# Altium PCB ALTAIR_PD_Sergeant_V26.3b.PcbDoc (part 3 of 4)
Units mm, origin at the board's own origin, x right, y up, seen from the top; angles counter-clockwise.
Board outline 74 x 56 mm, 4 copper layers (Top Layer, Layer 1, Layer 2, Bottom Layer), stack 1.675 mm thick; 222 components, 148 nets, 692 pads, 512 vias.
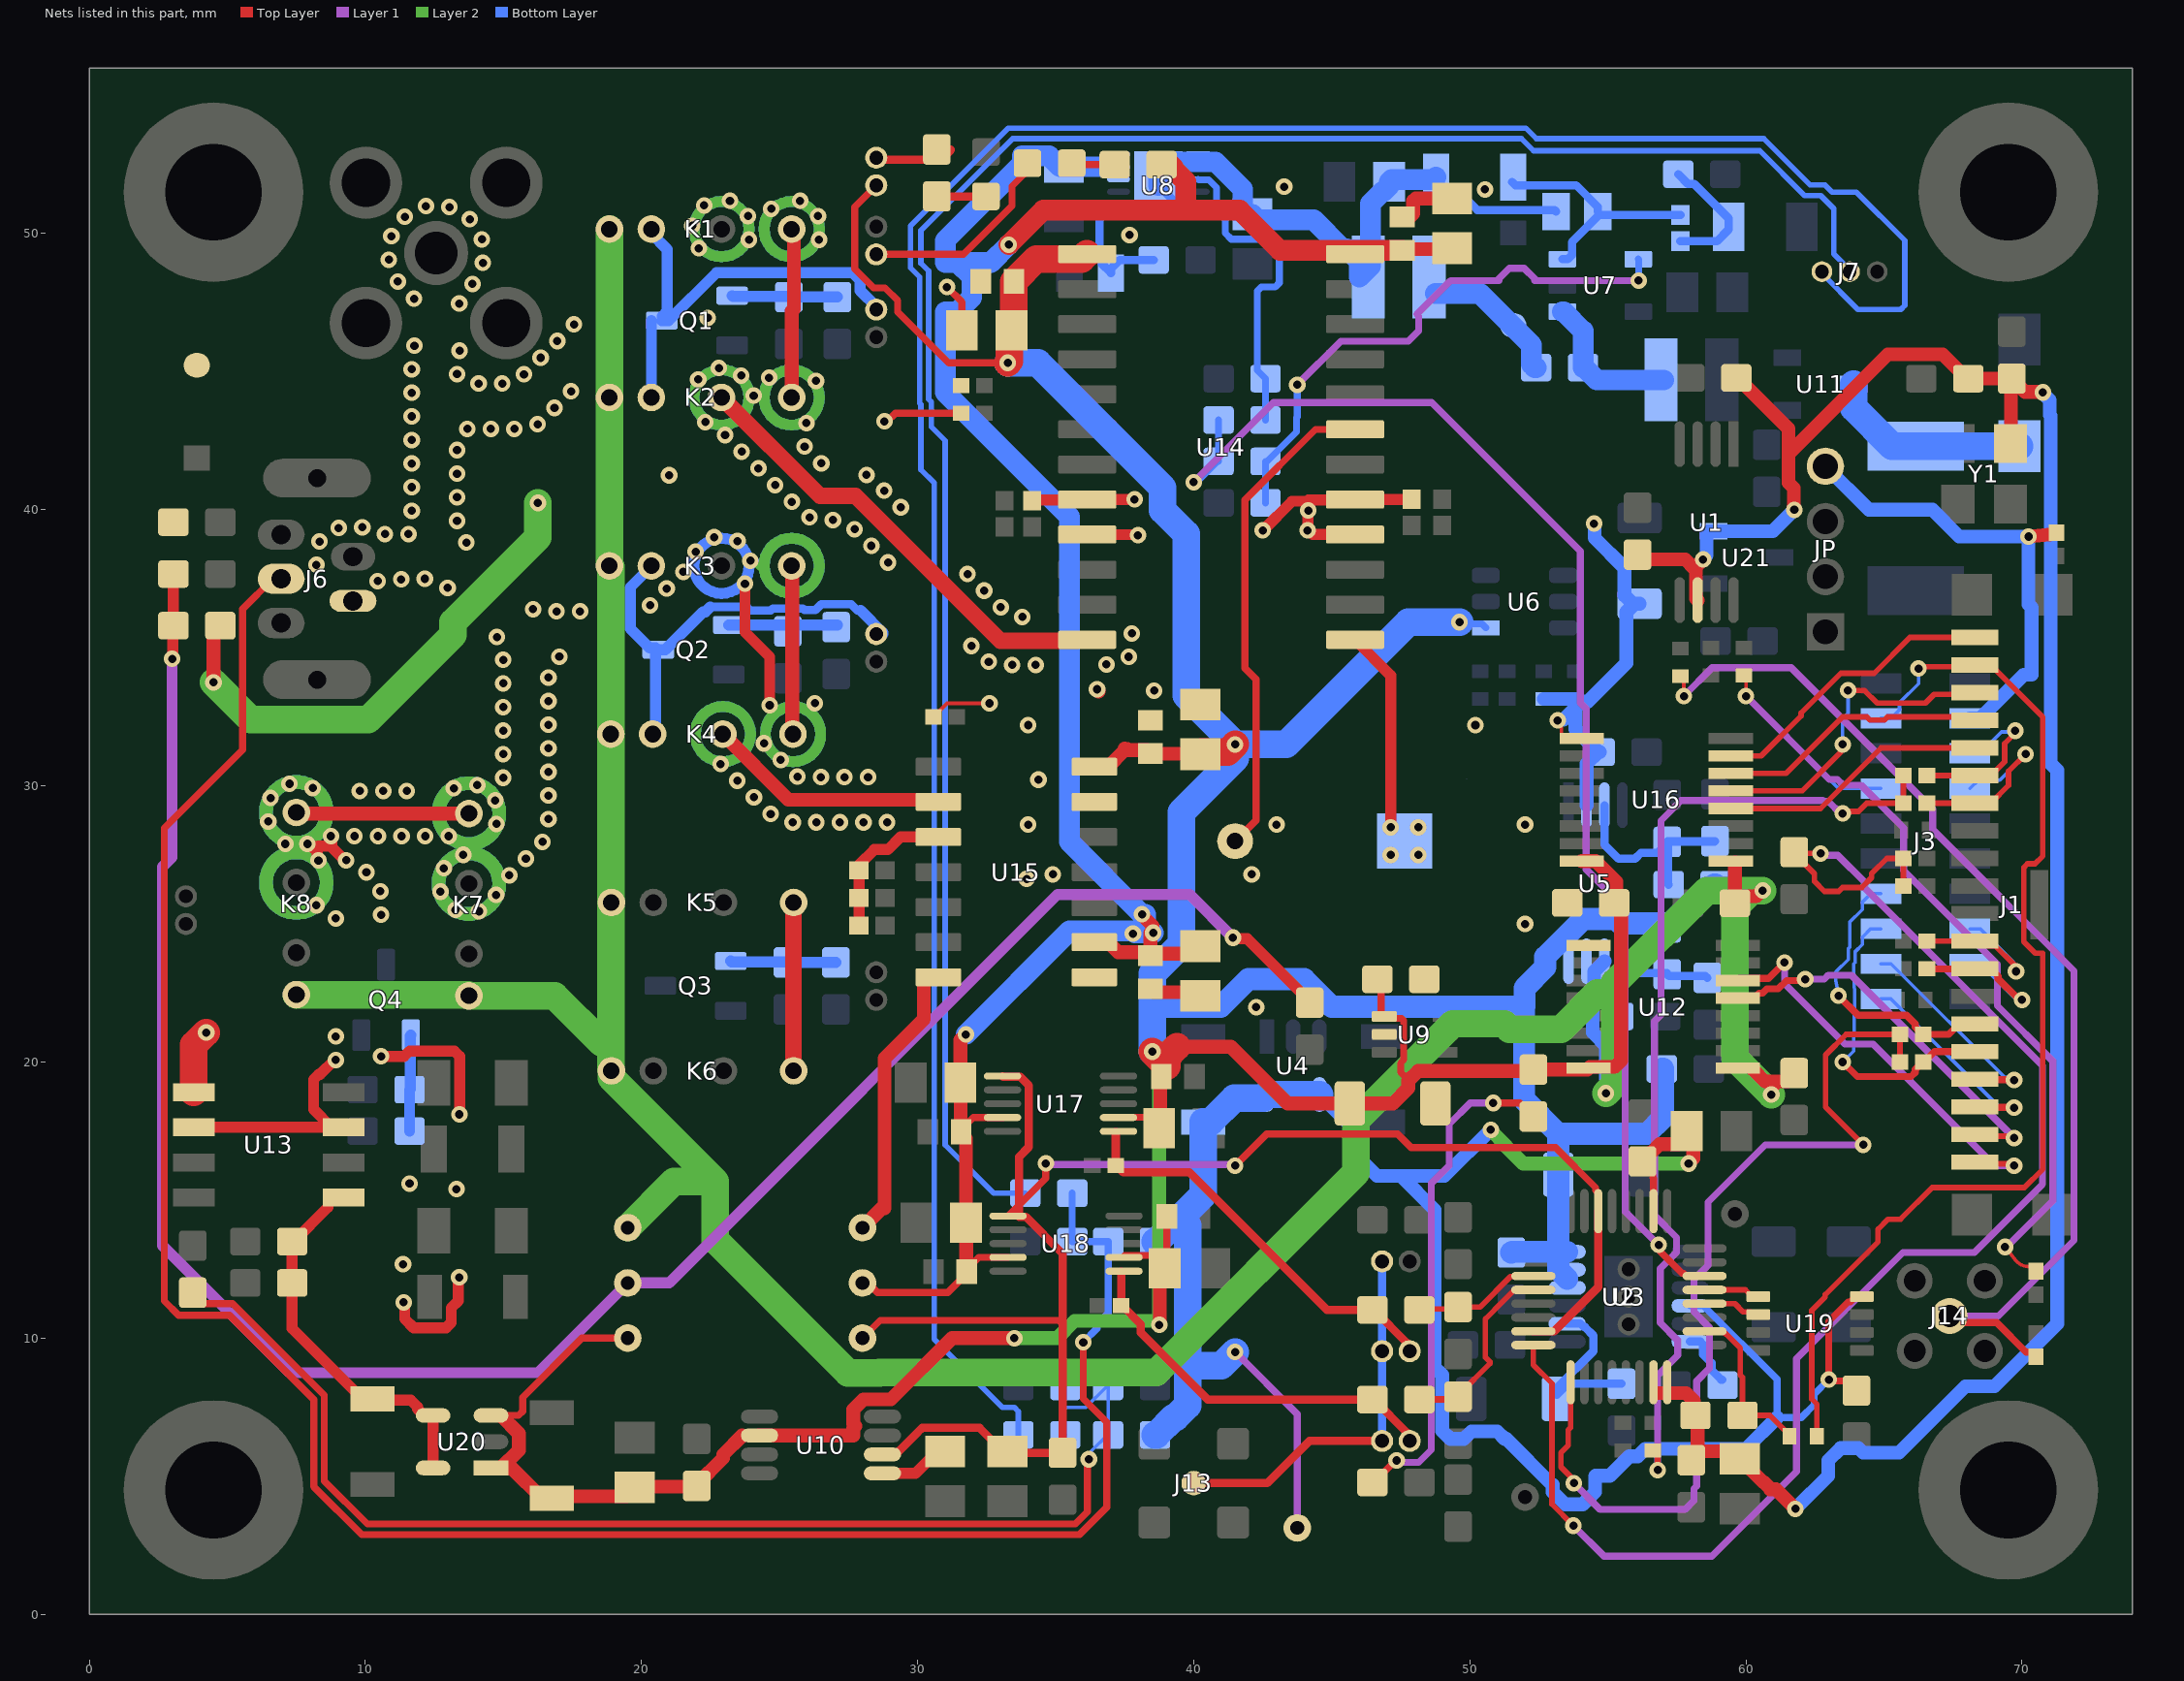
[diagram p4: the nets of this part, all layers, seen from the top]

## Via types
v1: diameter 0.6, hole 0.3, Top Layer to Bottom Layer, 346 vias
v2: diameter 0.8, hole 0.5, Top Layer to Bottom Layer, 122 vias
v3: diameter 0.6, hole 0.3, Top Layer to Bottom Layer, tented both sides, 44 vias

## Nets (pads, with @x,y where several pads share a name; then routed paths per layer and width w, separated by ;. In a path a pad name is that pad's centre, name@x,y a point inside that pad or via, vN(x,y) a via of type N, cw(c..) or ccw(c..) an arc to the next point about the centre after c; other vN are vias at no path point) (continued)
GUARD: (continued)
  other v1: 11.362,12.676 13.3,15.4 11.6,15.6 8.93,20.929 8.93,25.199 10.57,25.33 14.116,25.46 13.264,25.51 8.225,25.68 14.732,26.052 12.722,26.17 10.544,26.184 15.209,26.76 10.038,26.871 12.841,27.016 15.813,27.364 13.541,27.504 7.1,27.9 16.412,27.973 9.603,28.18 10.457,28.18 11.311,28.18 12.165,28.18 13.019,28.18 14.745,28.623 25.476,28.68 26.33,28.68 27.184,28.68 28.038,28.68 28.892,28.68 6.484,28.713 16.63,28.799 24.677,28.983 14.704,29.476 6.569,29.563 24.073,29.587 16.63,29.653 9.793,29.82 10.647,29.82 11.501,29.82 8.092,29.925 13.204,29.916 14.051,30.026 7.251,30.076 23.469,30.191 14.99,30.295 25.644,30.335 26.498,30.32 27.352,30.32 28.206,30.32 16.63,30.507 22.866,30.795 25.04,30.939 14.99,31.149 16.63,31.361 24.436,31.543 14.99,32.003 16.63,32.215 14.99,32.857 26.281,32.995 16.63,33.069 14.99,33.711 16.63,33.923 33.423,34.379 34.277,34.379 36.839,34.396 32.577,34.495 14.99,34.565 17.024,34.68 37.646,34.675 31.947,35.071 14.763,35.388 37.762,35.521 33.795,36.121 16.922,36.32 17.776,36.32 16.071,36.398 33.014,36.467 20.309,36.541 32.41,37.071 20.913,37.144 12.979,37.172 10.447,37.418 11.298,37.48 12.152,37.501 31.806,37.675 21.516,37.748 8.223,38.004 28.928,38.091 21.957,38.48 28.324,38.695 13.656,38.813 8.337,38.85 23.475,38.866 22.632,39.003 10.706,39.12 11.56,39.12 27.72,39.298 9.035,39.343 9.888,39.367 13.32,39.598 26.933,39.629 26.084,39.727 11.68,39.965 29.391,40.09 25.443,40.291 13.32,40.452 28.787,40.694 11.68,40.819 24.839,40.894 28.151,41.264 13.32,41.306 24.235,41.498 11.68,41.673 26.51,41.686 23.631,42.102 13.32,42.16 25.906,42.29 11.68,42.527 23.027,42.706 13.69,42.93 14.544,42.93 15.398,42.93 16.236,43.094 25.97,43.141 22.314,43.176 11.68,43.381 16.849,43.689 24.063,44.133 11.68,44.235 17.452,44.293 14.103,44.57 14.957,44.57 26.317,44.668 22.054,44.72 24.618,44.782 23.611,44.858 13.32,44.911 15.743,44.903 11.68,45.089 22.802,45.131 16.347,45.506 13.415,45.759 11.775,45.938 16.951,46.11 17.555,46.714 22.4,46.949 13.4,47.467 11.76,47.646 13.876,48.176 11.175,48.268 14.256,48.941 10.851,49.058 22.078,49.468 14.22,49.794 23.892,49.782 26.432,49.782 10.943,49.907 21.837,50.287 13.779,50.525 11.429,50.609 23.854,50.635 26.394,50.635 24.7,50.9 13.045,50.962 12.192,50.994 22.269,51.023 23.203,51.188 25.743,51.188
IVC_ADCIN: C63.2 R75.2 U2.4 | length 6.8
  Top Layer w0.2: C63.2@49.646,8.004 50.725,9.083 50.725,9.141 50.565,9.301 50.565,10.699 51.201,11.335 ; 51.202,11.335 51.598,11.731 U2.4@52.272,11.731
  Top Layer w0.254: R75.2@48.171,7.779 49.471,7.779 C63.2@49.571,7.879
IVC_CAPLINK: R58.1 R59.1 R60.1 U15.3 | length 5.5
  Top Layer w0.4: R60.1@27.875,24.941 27.875,27.137 28.431,27.693 28.923,27.693 29.381,28.151 U15.3@30.75,28.151
IVC_LVLAMP_OUT: JIVC.1 R63.2 R75.1 U18.6 | length 14
  Top Layer w0.3: U18.6@37.375,12.4 R63.2@37.375,11.185 37.4,11.185 38.08,10.505 38.08,10.202 40.503,7.779 R75.1@46.471,7.779 46.521,7.779 47.725,6.575 47.725,6.375 JIVC.1@47.821,6.279
IVC_RELAY_GND: J11.2 K3.2 K4.2 Q2.3 | length 16.4
  Bottom Layer w0.3: 22.494,36.483 23.82,36.483 23.945,36.358 24.619,36.358 24.689,36.358 24.758,36.427 25.842,36.427 25.902,36.367 26.298,36.367 26.508,36.577 27.592,36.577 27.811,36.358 27.931,36.358
  Bottom Layer w0.4: K3.2@20.358,37.971 20.358,37.954 19.589,37.184 19.589,35.699 20.288,35 Q2.3@20.5,35 ; K4.2@20.405,31.874 20.506,31.975 20.506,34.931 Q2.3@20.506,34.994 ; Q2.3@20.607,34.931 20.857,34.931 22.226,36.3 22.311,36.3 22.494,36.483 ; 27.931,36.358 28.75,35.539 J11.2@28.75,35.5
IVC_SW_1: J1.19 U12.5 | length 14.3
  Top Layer w0.2: J1.19@68.291,17.375 68.354,17.313 69.648,17.313 v1(69.71,17.25)
  Top Layer w0.254: U12.5@59.7,22.317 60.295,22.317 60.471,22.493 60.605,22.493 60.761,22.65 61.165,22.65 61.466,22.951 62.098,22.951 v1(62.147,23)
  Layer 1 w0.254: v1(62.147,23) 62.836,23 62.983,23.147 63.813,23.147 v1(69.71,17.25)
IVC_SW_1_Sol: J1.17 J3.17 | length 8
  Top Layer w0.254: J1.17@68.291,19.375 68.305,19.361 69.696,19.361 v1(69.71,19.347)
  Bottom Layer w0.127: J3.17@64.887,23.555 65.255,23.555 69.373,19.438 69.619,19.438 v1(69.71,19.347)
IVC_SW_2: J1.20 U12.6 | length 15.2
  Top Layer w0.2: J1.20@68.291,16.375 68.354,16.312 69.648,16.312 v1(69.71,16.25)
  Top Layer w0.254: U12.6@59.7,22.952 59.778,23.031 60.823,23.031 v1(61.396,23.604)
  Layer 1 w0.254: v1(61.396,23.604) 61.396,22.836 63.585,20.647 64.603,20.647 69,16.25 v1(69.71,16.25)
IVC_SW_2_Sol: J1.18 J3.19 | length 7.9
  Top Layer w0.254: J1.18@68.291,18.375 68.305,18.361 69.696,18.361 v1(69.71,18.347)
  Bottom Layer w0.127: J3.19@64.887,22.285 65.255,22.285 69.193,18.347 v1(69.71,18.347)
IVC_SW_IN: K4.3 U15.2 | length 8.8
  Top Layer w0.5: K4.3@22.945,31.874 25.319,29.5 U15.2@30.75,29.5
MMCX_Testcon: J13.1 JACF.2 JIVC.2 JTIA.2 | length 14
  Top Layer w0.3: J13.1@40,4.75 42.658,4.75 44.187,6.279 JIVC.2@46.821,6.279
  Bottom Layer w0.3: JIVC.2@46.821,6.279 JACF.2@46.821,9.529 JTIA.2@46.821,12.779
NEG_SW: R19.2 R20.2 U2.22 | length 48.7
  Top Layer w0.254: v1(56.837,13.377) 56.903,13.311 56.903,13.126 57.683,12.346 57.742,12.346 57.838,12.25 U2.22@58.5,12.25
  Layer 1 w0.254: v1(40,41) 42.881,43.881 48.619,43.881 54,38.5 54,33.008 54.208,32.8 54.208,26.974 55.627,25.555 55.627,14.587 v1(56.837,13.377)
  Bottom Layer w0.254: v1(40,41) 40.066,41.066 40.166,41.066 40.85,41.75 R20.2@40.9,41.75 R19.2@40.9,43.25
NetC00_2: C00.2 R0.1 R33.1 TP7.1 | length 76.7
  Top Layer w0.4: v1(3,34.6) 3.024,34.624 C00.2@3.024,35.777 ; C00.2@3.047,35.801 R0.1@3.047,37.676 ; v1(41.417,24.503) 41.456,24.465 41.935,24.465 44.2,22.2 R33.1@44.2,22.15
  Layer 1 w0.4: v1(3,34.6) 3,27.419 2.646,27.065 2.646,13.354 7.25,8.75 16.25,8.75 TP7.1@19.5,12 21,12 35.07,26.07 39.85,26.07 v1(41.417,24.503)
NetC3_2: C3.2 R15.2 U3.8 | length 6.3
  Bottom Layer w0.3: U3.8@53.525,10.525 54.004,10.525 54.127,10.402 54.168,10.402 54.477,10.093 54.477,9.527 53.15,8.2 53.15,7.95 53.55,8.35 R15.2@55.5,8.35
NetC7_1: C7.1 U10.5 | length 2
  Top Layer w0.4: U10.5@28.725,5.108 29.925,5.108 C7.1@30.5,5.683
NetC10_2: C10.2 R21.1 R22.2 U5.5 | length 5.6
  Bottom Layer w0.3: C10.2@55.375,21.65 55.51,21.785 55.51,23.634 U5.5@55.525,23.65 55.525,23.262 55.562,23.225 R21.1@57.15,23.225 ; R21.1@57.15,23.175 57.212,23.113 58.538,23.113 R22.2@58.6,23.05
NetC11_2: C11.2 R23.1 R24.2 U5.3 | length 7.5
  Bottom Layer w0.3: U5.3@54.875,29.3 54.875,27.872 55.383,27.365 55.986,27.365 56.2,27.579 56.8,27.579 57.15,27.929 C11.2@57.15,27.975 ; R23.1@57.2,26.425 57.175,26.45 57.175,27.95 C11.2@57.15,27.975 ; R24.2@58.875,28 58.862,27.988 57.162,27.988 C11.2@57.15,27.975
NetC15_1: C15.1 L1.2 U7.1 | length 5.4
  Bottom Layer w0.75: U7.1@53.35,47.175 53.4,47.175 54.1,46.475 C15.1@54.1,45.15 ; C15.1@54.15,45.15 54.6,44.7 L1.2@57.024,44.7
NetC15_2: C15.2 D1.2 L2.1 | length 5.2
  Bottom Layer w0.75: L2.1@48.75,47.836 50.364,47.836 51.454,46.746 51.454,46.741 52.225,45.97 52.225,45.275 52.35,45.15 C15.2@52.4,45.15
NetC16_2: C16.2 R29.1 R30.2 U7.3 | length 8.7
  Bottom Layer w0.3: C16.2@51.525,51.875 51.648,51.752 53.848,51.752 54.625,50.975 R29.1@54.625,50.8 ; U7.3@53.35,49.075 53.55,49.075 53.7,49.225 53.7,49.7 R29.1@54.625,50.625 ; R29.1@54.746,50.679 R30.2@57.625,50.679
NetC17_1: C17.1 R30.1 R31.2 | length 4.8
  Bottom Layer w0.3: C17.1@57.55,52.15 57.9,51.8 58.125,51.8 59.375,50.55 R31.2@59.375,50.25 59.375,50.146 58.95,49.721 R30.1@57.625,49.721
NetC21_1: C21.1 R32.1 U8.8 | length 5
  Bottom Layer w0.3: U8.8@37.278,51.067 36.875,51.067 36.586,50.778 36.586,49.389 36.675,49.3 36.675,48.9 C21.1@37,48.575 37,48.725 37.325,49.05 R32.1@38.55,49.05
NetC32_2: C32.2 R49.1 R50.2 R51.1 RT1.2 | length 46.6
  Top Layer w0.254: RT1.2@3.75,11.65 3.75,11.619 4.123,11.246 5.195,11.246 8.512,7.929 8.512,4.829 10.07,3.271 35.707,3.271 36.148,3.712 36.148,5.562 v1(36.202,5.616)
  Bottom Layer w0.127: R49.1@35.35,6.5 35.25,6.6 35.25,7.426 ; R50.2@35.35,8.25 35.25,8.15 35.25,7.426 ; v1(36.202,5.616) 36.293,5.707 36.293,5.91 36.883,6.5 R51.1@36.9,6.5 C32.2@36.9,8.25 36.85,8.25 36.1,7.5 35.324,7.5 35.25,7.426
NetD2_2: D2.2 R18.1 | length 1.8
  Top Layer w0.3: R18.1@30.696,51.35 D2.2@32.475,51.35
NetD4_1: D4.1 F1.2 U11.3 | length 7.4
  Bottom Layer w1: U11.3@63.9,44.55 63.9,43.695 65.29,42.305 F1.2@66.15,42.305 66.153,42.303 69.897,42.303 D4.1@69.9,42.3
NetD5_1: D5.1 R79.1 | length 1.6
  Top Layer w0.254: D5.1@35.8,52.5 R79.1@37.4,52.5
NetD5_2: -11.1 D5.2 | length 7.5
  Top Layer w0.254: -11.1@28.5,49.25 31.661,49.25 33.417,51.006 33.417,51.717 D5.2@34.2,52.5
NetJ6_3: J6.3 R44.1 R47.1 R48.2 | length 81.4
  Top Layer w0.254: J6.3@6.95,37.5 6.65,37.5 5.551,36.401 5.551,31.305 2.719,28.473 2.719,11.345 3.238,10.826 5.076,10.826 8.131,7.771 8.131,4.619 9.86,2.89 35.865,2.89 36.849,3.875 36.849,6.958 36,7.807 v1(36,9.853)
  Bottom Layer w0.254: R47.1@35.6,15.25 R48.2@35.6,13.5 R44.1@36.9,13.5 36.9,10.9 36.498,10.498 36.498,10.351 v1(36,9.853)
NetJ7_1: J7.1 R49.2 | length 90.8
  Bottom Layer w0.2: R49.2@33.65,6.5 33.65,7.347 33.501,7.496 33.068,7.496 30.6,9.964 30.6,40.973 30.119,41.454 30.119,43.817 30.071,43.865 30.071,48.434 29.738,48.767 29.738,50.273 33.288,53.823 52.025,53.823 52.406,53.442 60.643,53.442 62.324,51.76 62.863,51.76 63.123,51.5 64,51.5 65.75,49.75 65.75,47.399 65.601,47.25 64.056,47.25 62.75,48.556 J7.1@62.75,48.625
NetJ7_2: J7.2 R47.2 | length 75.1
  Bottom Layer w0.2: R47.2@33.9,15.25 32.75,15.25 31,17 31,42.5 30.5,43 30.5,43.899 30.398,44.001 30.398,48.645 30.119,48.924 30.119,50.115 33.446,53.442 51.868,53.442 52.309,53 60.5,53 62.121,51.379 62.705,51.379 63.18,50.904 63.18,49.264 63.75,48.694 J7.2@63.75,48.625
NetJ9_1: J9.1 U14.1 | length 7.3
  Top Layer w0.4: U14.1@45.843,35.29 47.133,34 v3(47.133,28.5)
  other v3: 47.133,27.5 48.133,27.5 48.133,28.5
NetJ14_1: J14.1 R70.1 R72.1 | length 39.5
  Top Layer w0.127: R70.1@57.625,33.975 57.75,33.85 v1(57.75,33.25)
  Top Layer w0.254: J14.1@67.38,10.805 67.663,10.805 67.902,10.566 69.077,10.566 70.145,9.498 70.352,9.498 70.5,9.35 R72.1@70.5,9.325
  Layer 1 w0.254: v1(57.75,33.25) 58.778,34.278 61.637,34.278 66.759,29.156 66.759,28.419 71.881,23.297 71.881,13.542 69.144,10.805 J14.1@67.38,10.805
NetJLEDP_2: LED.2 R18.2 | length 2.1
  Top Layer w0.3: LED.2@28.775,52.675 R18.2@30.346,52.675 ; R18.2@30.846,52.675 31.196,53.025 31.196,53.05
NetK1_4: K1.4 K2.4 | length 6.3
  Top Layer w0.4: K2.4@25.438,44.062 K2.4@25.5,44
  Top Layer w0.5: K2.4@25.438,44.062 25.438,47.188 25.52,47.27 25.52,50.081 K1.4@25.438,50.163
NetK3_4: K3.4 K4.4 | length 6
  Top Layer w0.4: K3.4@25.438,37.971 K3.4@25.461,37.947 ; K4.4@25.461,32.039 K4.4@25.5,32
  Top Layer w0.5: K4.4@25.461,32.039 K3.4@25.461,37.947
NetK5_4: K5.4 K6.4 | length 6.1
  Top Layer w0.6: K5.4@25.5,25.75 25.509,25.741 K6.4@25.509,19.682
NetK7_4: K7.4 K8.4 | length 6.3
  Top Layer w0.5: K8.4@7.5,29 K7.4@13.75,29
NetQ1_1: Q1.1 R36.1 R37.1 | length 3.8
  Bottom Layer w0.4: Q1.1@23.284,47.753 23.309,47.728 25.313,47.728 R37.1@25.338,47.703 R36.1@27.092,47.703
NetQ2_1: Q2.1 R39.1 R40.1 | length 3.9
  Bottom Layer w0.4: Q2.1@23.157,35.831 R40.1@25.294,35.831 ; R40.1@25.3,35.825 R39.1@27.1,35.825
NetQ3_1: Q3.1 R42.1 R43.1 | length 3.8
  Bottom Layer w0.4: Q3.1@23.232,23.657 23.257,23.632 25.261,23.632 R43.1@25.286,23.607 R42.1@27.04,23.607
NetQ4_1: Q4.1 R38.1 R41.1 | length 3.5
  Bottom Layer w0.4: R38.1@11.6,17.5 R41.1@11.6,19 11.625,19.025 11.625,20.95 Q4.1@11.65,20.975
NetR1_2: R1.2 R2.2 U2.18 | length 6.1
  Top Layer w0.2: U2.18@58.5,10.25 59.177,10.25 59.3,10.127 59.306,10.127 59.794,9.639 59.794,8.659 59.871,8.582 R1.2@59.871,7.204 60.863,7.204 61.571,6.496 R2.2@61.571,6.446
NetR3_2: R3.2 R4.2 R65.2 | length 36
  Top Layer w0.2: R65.2@56.621,5.929 56.652,5.929 56.802,5.779 v1(56.802,5.227) ; v1(63.5,29) 63.577,29.077 64.077,29.077 64.375,29.375 R4.2@65.7,29.375 R3.2@65.7,30.375
  Layer 1 w0.254: v1(56.802,5.227) 56.802,8.653 57.531,9.383 57.531,9.919 56.896,10.554 56.896,12.522 57.484,13.109 57.484,13.645 56.688,14.441 56.688,21.477 56.921,21.71 56.921,28.746 57.647,29.472 62.773,29.472 62.801,29.444 62.981,29.444 63.425,29 v1(63.5,29)
NetR6_2: R6.2 R7.2 R8.1 U2.8 | length 55.1
  Top Layer w0.2: U2.8@52.3,9.75 52.3,9.029 52.972,8.357 52.972,3.988 v1(53.75,3.21) ; v1(62.702,27.556) 62.024,27.556 61.884,27.416 62.48,26.82 62.48,26.543 62.843,26.18 63.357,26.18 63.497,26.32 64.192,26.32 64.553,26.682 64.553,26.828 65.1,27.375 R6.2@65.7,27.375 R7.2@65.7,26.375
  Layer 1 w0.254: v1(53.75,3.21) 54.857,2.103 58.768,2.103 61.831,5.166 61.831,9.254 65.683,13.106 68.272,13.106 70.738,15.572 70.738,19.865 64.31,26.293 64.31,26.505 63.325,27.49 62.769,27.49 v1(62.702,27.556)
NetR12_2: R12.2 R13.2 U2.9 | length 34.7
  Top Layer w0.2: U2.9@53.65,8.4 53.65,6.761 53.565,6.676 53.565,6.113 53.299,5.847 53.299,5.334 53.65,4.983 53.65,4.868 v1(53.768,4.75) ; v1(64.25,17) 62.88,18.37 62.88,20.257 63.623,21 R12.2@65.575,21 R13.2@65.575,20
  Layer 1 w0.254: v1(53.768,4.75) 54.724,3.794 57.794,3.794 58.119,4.119 58.119,4.551 58.211,4.643 58.211,8.446 58.674,8.909 58.674,10.392 58.119,10.948 58.119,12.128 58.627,12.636 58.627,14.927 60.7,17 v1(64.25,17)
NetR14_2: R14.2 U3.6 | length 2.1
  Bottom Layer w0.3: U3.6@57.975,9.875 58.346,9.875 58.438,9.783 58.438,9.412 58.75,9.1 58.75,8.85 59.1,8.5 R14.2@59.15,8.5